# Altium PCB RobonAUT_PCB.PcbDoc (part 1 of 2)
Units mil, origin at the board's own origin, x right, y up, seen from the top; angles counter-clockwise.
Board outline 5019.69 x 5708.66 mil, 2 copper layers (Top Layer, Bottom Layer), stack 62.441 mil thick; 70 components, 117 nets, 446 pads, 237 vias.
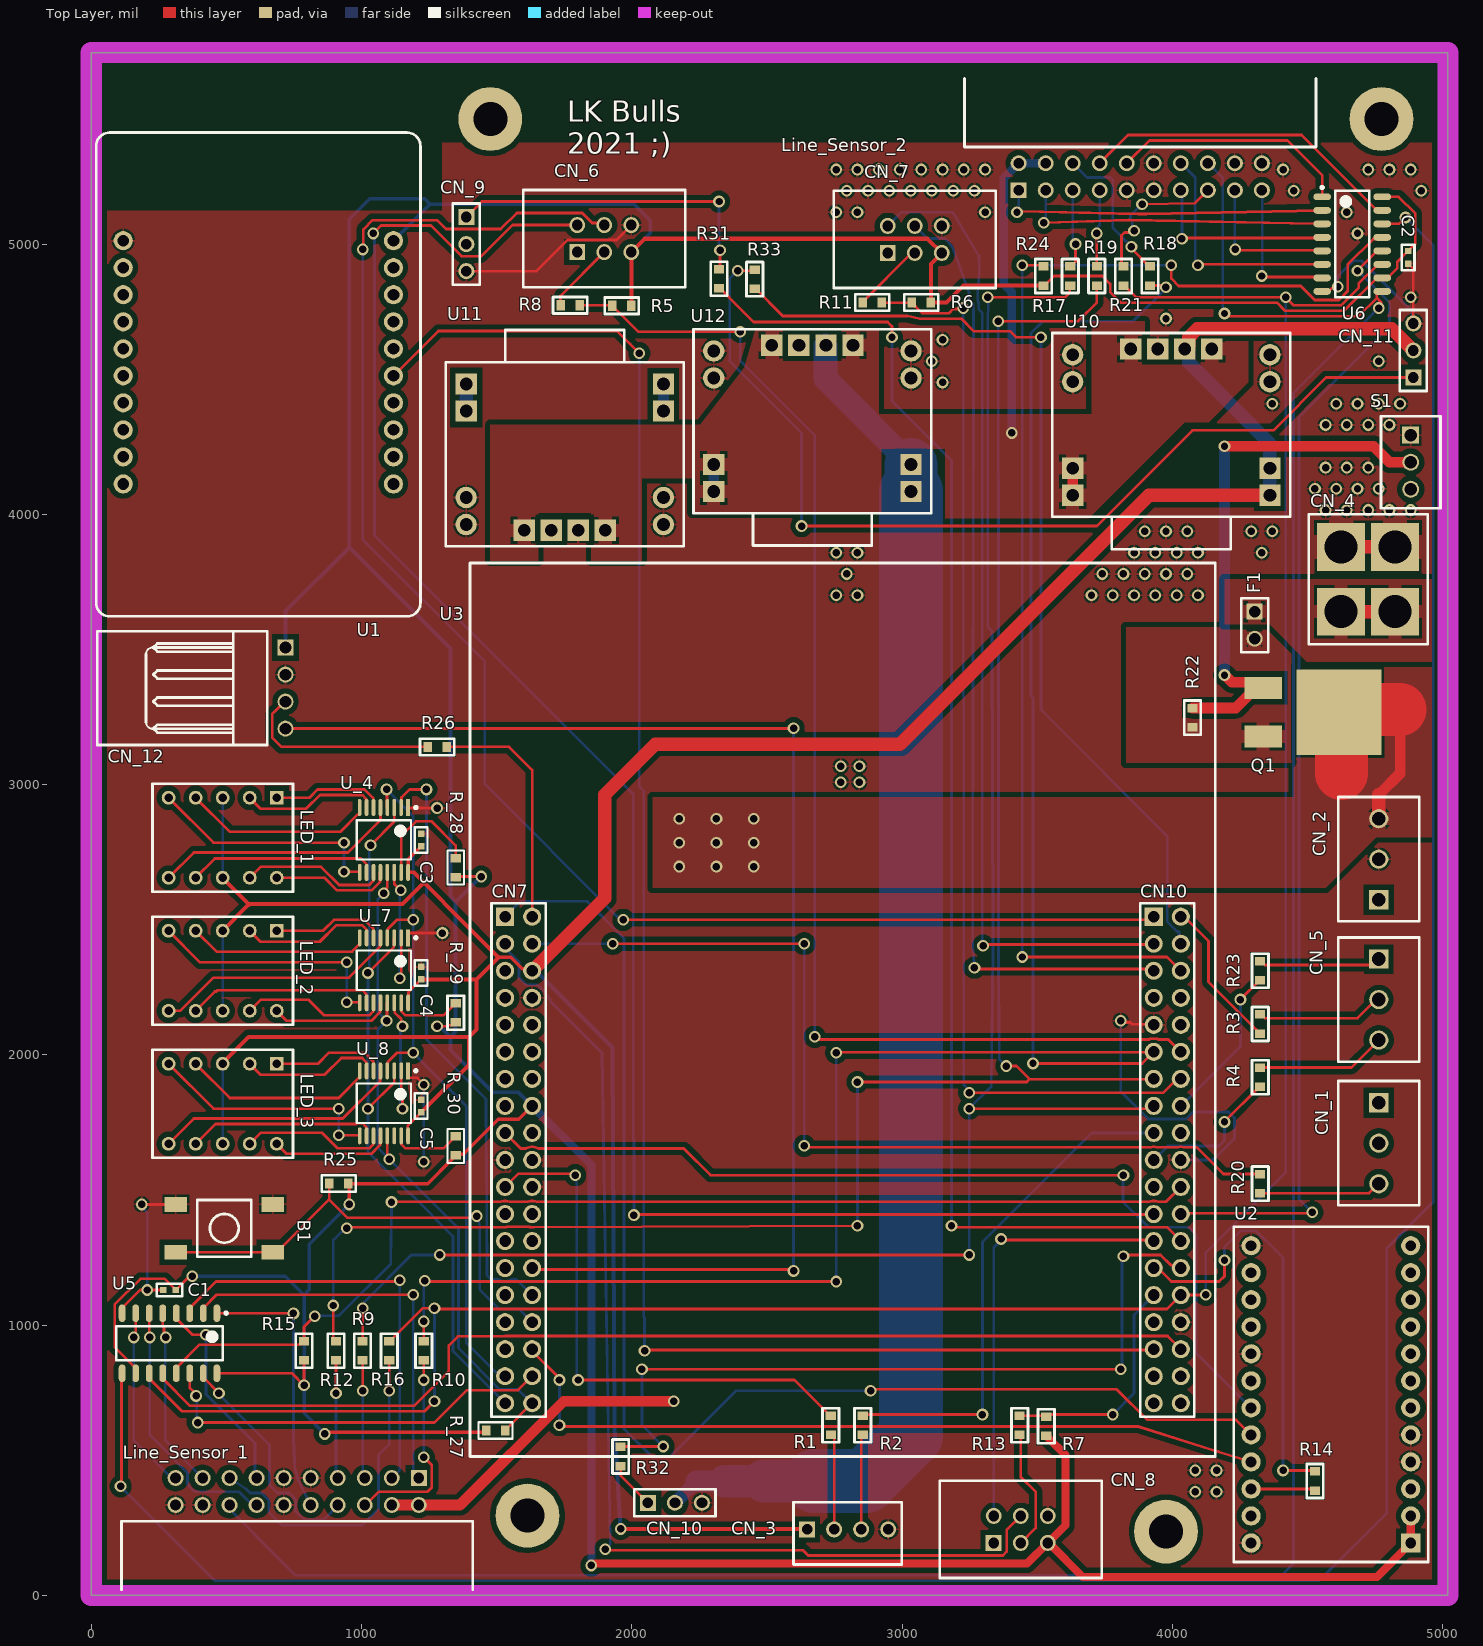
[diagram p0: Top Layer view]
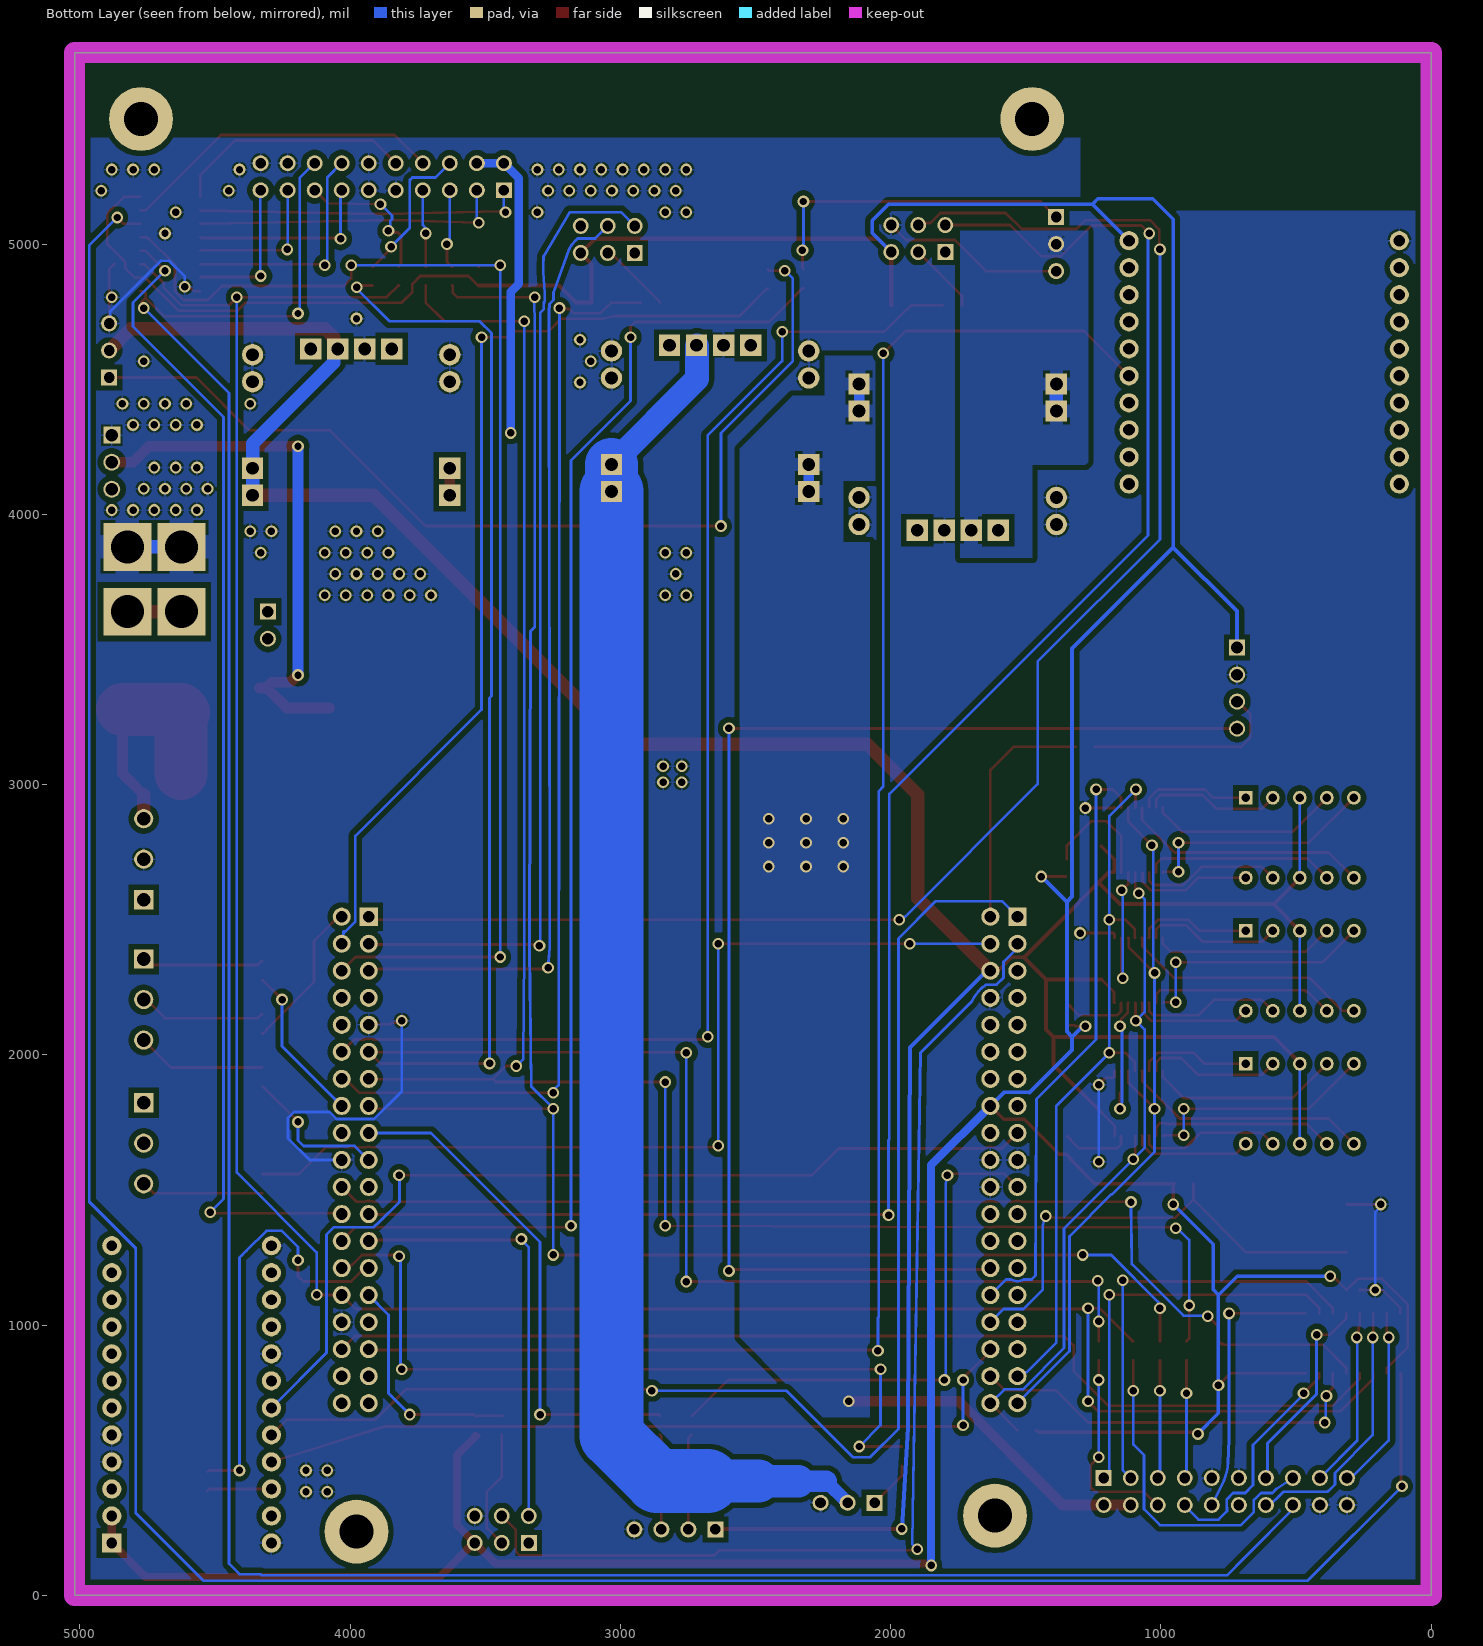
[diagram p1: Bottom Layer view, seen from below]
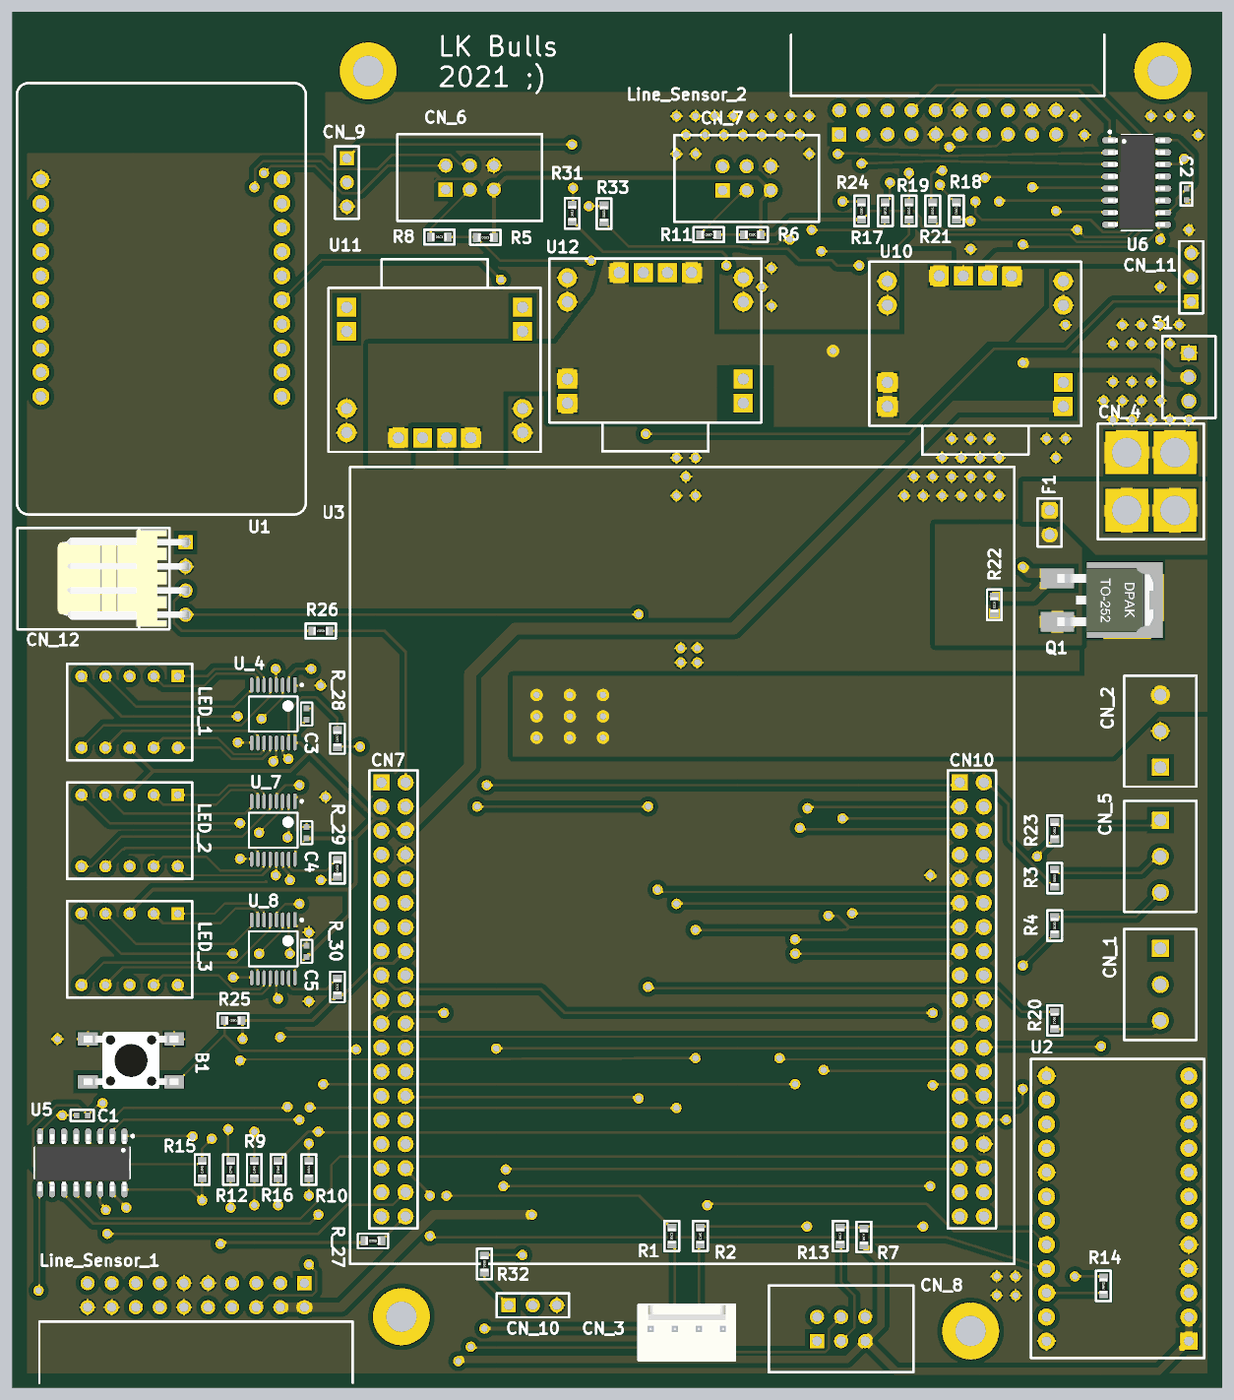
[diagram p3: 3D render of the assembled board from above, using the file's embedded part models]

## Layer stack, top to bottom
Top Solder: solder mask 0.4, Solder Resist, Dk 3.5
Top Layer: signal copper 0.7087
Dielectric1: core 61.0236, FR-4, Dk 4.8
Bottom Layer: signal copper 0.7087
Bottom Solder: solder mask 0.4, Solder Resist, Dk 3.5

## Board outline
0,0 5019.68,0 5019.68,5708.66 0,5708.66

## Design rules (kind name [scope] priority, off if disabled: settings)
BoardOutlineClearance [All] p1: gap=9.84 ignorepadtopadclearanceinfootprint=FALSE except(0: Arc-SplitContinuation Track-SplitContinuation SMDPad-SplitContinuation THPad-SplitContinuation Via-SplitContinuation Fill-SplitContinuation Poly-SplitContinuation Region-SplitContinuation Text-SplitContinuation)
Clearance Clearance-xPP-xTP-xTT [All] p1: gap=10 ignorepadtopadclearanceinfootprint=FALSE except(0: Arc-Hole Track-Hole SMDPad-Hole THPad-Hole Via-Hole Fill-Hole Poly-Hole Region-Hole Text-Hole; 20: Arc-Fill Arc-Poly Arc-Region Track-Fill Track-Poly Track-Region SMDPad-Fill SMDPad-Poly SMDPad-Region THPad-Fill THPad-Poly THPad-Region Via-Fill Via-Poly Via-Region Fill-Fill Fill-Poly Fill-Region Poly-Poly Poly-Region Region-Region)
ComponentClearance [All] p1: gap=9.84 collisioncheckmode=3 verticalgap=9.84 showdistances=FALSE
DiffPairsRouting [All] p1: maxlimit=9.84 minlimit=9.84 mostfreqgap=9.84 toplayer_minwidth=15 toplayer_maxwidth=15 toplayer_prefwidth=15 bottomlayer_minwidth=15 bottomlayer_maxwidth=15 bottomlayer_prefwidth=15 maxuncoupledlength=492.13
Height [All] p1: minheight=0 maxheight=984.25 prefheight=492.13
HoleSize HoleSize-PTH [All] p1: absolutevalues=TRUE maxlimit=236.22 minlimit=27.56 maxpercent=80.000 minpercent=20.000
HoleToHoleClearance [All] p1: gap=13.78 allowstackedmicrovias=TRUE
MinimumAnnularRing "Minimum IAR  >0.45mm" [((ObjectKind = 'Pad') OR (ObjectKind = 'Via')) And (Layer = 'MultiLayer') And (HoleDiameter > AsMM(0.45))] p1: minimumring=6.89 // minimum inner annular ring for pads > 0.45mm finished hole size
MinimumAnnularRing "Minimum IAR <=0.45mm" [((ObjectKind = 'Pad') OR (ObjectKind = 'Via')) And (Layer = 'MultiLayer') And (HoleDiameter <= AsMM(0.45))] p2: minimumring=6.89 // minimum inner annular ring for pads <= 0.45mm finished hole size
MinimumSolderMaskSliver [All] p1: minsoldermaskwidth=3.15
PlaneClearance PlaneClearance-IPI [All] p1: clearance=9.84
PlaneConnect [All] p1: planeconnectstyle=Relief reliefexpansion=6.89 reliefentries=4 reliefconductorwidth=7.87 reliefairgap=7.87
PolygonConnect PolygonConnect_4 [InNet('GND') vs HasFootprint('TáP AKKSIHOZ')] p1: connectstyle=Relief reliefconductorwidth=90 reliefentries=4 polygonreliefangle="90 Angle" airgapwidth=10
PolygonConnect PolygonConnect_3 [InNet('NetF1_2') vs InNet('NetF1_2')] p2: connectstyle=Relief reliefconductorwidth=50 reliefentries=4 polygonreliefangle="90 Angle" airgapwidth=10
PolygonConnect PolygonConnect_2 [InNet('11.1V') vs InNet('11.1V')] p3: connectstyle=Relief reliefconductorwidth=50 reliefentries=4 polygonreliefangle="90 Angle" airgapwidth=10
PolygonConnect PolygonConnect_1 [InNet('NetCN_4_1') vs InNet('NetCN_4_1')] p4: connectstyle=Relief reliefconductorwidth=50 reliefentries=4 polygonreliefangle="90 Angle" airgapwidth=10
PolygonConnect [InNet('6V_1') vs InNet('6V_1')] p5: connectstyle=Relief reliefconductorwidth=50 reliefentries=4 polygonreliefangle="90 Angle" airgapwidth=10
PolygonConnect PolygonConnect-xTW [All] p6: connectstyle=Relief reliefconductorwidth=7.87 reliefentries=4 polygonreliefangle="90 Angle" airgapwidth=7.87
RoutingCorners [All] p1: cornerstyle=45-Degree minsetback=98.43 maxsetback=98.43
RoutingVias "RoutingVias > 0.45mm" [(ObjectKind = 'Via') And (HoleDiameter > AsMM(0.45))] p1: holewidth=19.68 width=33.46 viastyle="Through Hole" minholewidth=19.68 minwidth=33.46 maxholewidth=35.43 maxwidth=49.21 // finishet hole size > 0.45mm
RoutingVias "RoutingVias <= 0.45mm" [(ObjectKind = 'Via') And (HoleDiameter <= AsMM(0.45))] p2: holewidth=11.81 width=25.59 viastyle="Through Hole" minholewidth=9.84 minwidth=23.62 maxholewidth=17.72 maxwidth=31.5 // finishet hole size <= 0.45mm
SilkToSilkClearance [All] p1: silktosilkclearance=7.87
SilkToSolderMaskClearance SilkscreenOverComponentPads [IsPad] p1: minsilkscreentomaskgap=6.69 clearancetoexposedcopper=TRUE
SolderMaskExpansion [All] p1: expansion=3.94 istentingtop=FALSE
UnRoutedNet [All] p1: checkbadconnections=TRUE
Width Width-xTW [All] p1: maxlimit=236.22 minlimit=10 preferedwidth=12 minimp=50.000000 maximp=50.000000 favimp=50.000000
18 further rules are at their usual default settings.

## Classes and differential pairs
component class vonalszenzorok: C1 C2 Line_Sensor_1 Line_Sensor_2 R9 R10 R12 R15 R16 R17 R18 R19 R21 R24 U5 U6
component class tap: CN_4 F1 Q1 R22 S1 U10 U11 U12
component class szervok: CN_9 CN_10 CN_11 R31 R32 R33
component class nucleo_es_egyszerubb_dolgok: B1 CN_1 CN_2 CN_3 CN_5 CN_6 CN_7 CN_8 CN_12 R1 R2 R3 R4 R5 R6 R7 R8 R11 R13 R14 R20 R23 R25 R26 U1 U2 U3
component class kijelzok: C3 C4 C5 LED_1 LED_2 LED_3 R_27 R_28 R_29 R_30 U_4 U_7 U_8

## Components (designator, comment, footprint, x,y, rotation, side; value= is the part's Value field where it differs from the comment)
B1 "Button" FP_BTN_SMD 492.13,1358.27 r90 top
C1 "100nF" FP_0402_CAP_050 289.42,1130.19 r0 top
C2 "100nF" FP_0402_CAP_050 4872.05,4950.79 r90 top
C3 "100nF" FP_0402_CAP_050 1220.47,2795.28 r270 top
C4 "100nF" FP_0402_CAP_050 1220.47,2303.15 r270 top
C5 "100nF" FP_0402_CAP_050 1220.47,1811.02 r270 top
CN_1 "DC_drive_CN4" DC_DRIVE_CN_STELVIO 4763.78,1673.23 r90 top
CN_2 "DC_drive_CN2" DC_DRIVE_CN_STELVIO 4763.78,2724.02 r270 top
CN_3 "Magnes" FP_CONN4_TAP_254MM 2648.48,244.36 r270 top
CN_4 "https://shop.modell.hu/kabel-amass-xt60-cap-apa-csatlakozoval-szerelve" "TáP AKKSIHOZ" 4724.41,3759.84 r0 top
CN_5 "DC_drive_CN5" DC_DRIVE_CN_STELVIO 4763.78,2204.72 r90 top
CN_6 "tavolsagszenzor board lábsor" "6P KONNEKTOR (TáVOLSáGSZENZOR)" 1898.03,5020.47 r0 top
CN_7 "tavolsagszenzor board lábsor" "6P KONNEKTOR (TáVOLSáGSZENZOR)" 3046.9,5017.19 r0 top
CN_8 "tavolsagszenzor board lábsor" "6P KONNEKTOR (TáVOLSáGSZENZOR)" 3439.03,244.36 r0 top
CN_9 "kormanyzo szervo" FP_CONN3_TUSKE_254MM 1387.8,5100 r180 top
CN_10 "kormanyzo szervo" FP_CONN3_TUSKE_254MM 2059.5,342.79 r270 top
CN_11 "szenzor szervo" FP_CONN3_TUSKE_254MM 4891.73,4506.3 r0 top
CN_12 "Bluetooth" FP_CONN4_TAP_254MM_90 718.5,3507.09 r180 top
F1 "Fuse" FP_CONN2_TUSKE_254MM 4304.37,3639.84 r180 top
LED_1 "8_Segment_display" "8 SEGMENT DISPLAY" 486.27,2803.42 r270 top
LED_2 "8_Segment_display" "8 SEGMENT DISPLAY" 486.27,2311.29 r270 top
LED_3 "8_Segment_display" "8 SEGMENT DISPLAY" 486.27,1819.16 r270 top
Line_Sensor_1 "Line_Sensor" CONNECTOR-20P 1211.81,434.65 r0 top
Line_Sensor_2 "Line_Sensor" CONNECTOR-20P 3431.22,5199.21 r180 top
Q1 "PMOS" FP_DPAK-TO252 4616.14,3267.72 r270 top
R1 "1K" FP_0603_RES 2736.22,629.92 r90 top
R2 "1K" FP_0603_RES 2854.33,629.92 r270 top
R3 "1K" FP_0603_RES 4324.85,2114.44 r90 top
R4 "1K" FP_0603_RES 4324.85,1917.59 r90 top
R5 "20K" FP_0603_RES 1962.65,4771.92 r0 top
R6 "20K" FP_0603_RES 3070.87,4783.46 r180 top
R7 "20K" FP_0603_RES 3533.46,625.98 r90 top
R8 "1K" FP_0603_RES 1771.65,4773.62 r0 top
R9 "1K" FP_0603_RES 1003.94,905.51 r270 top
R10 "1K" FP_0603_RES 1230.31,905.51 r90 top
R11 "1K" FP_0603_RES 2889.76,4783.46 r0 top
R12 "1K" FP_0603_RES 905.51,905.51 r270 top
R13 "1K" FP_0603_RES 3435.04,629.92 r90 top
R14 "1K" FP_0603_RES 4527.56,423.23 r90 top
R15 "20K" FP_0603_RES 787.4,905.51 r270 top
R16 "1K" FP_0603_RES 1102.36,905.52 r270 top
R17 "1K" FP_0603_RES 3622.04,4881.9 r90 top
R18 "1K" FP_0603_RES 3917.32,4881.9 r270 top
R19 "1K" FP_0603_RES 3720.47,4881.9 r90 top
R20 "1K" FP_0603_RES 4324.85,1523.89 r270 top
R21 "1K" FP_0603_RES 3818.89,4881.9 r90 top
R22 "20K" FP_0603_RES 4074.8,3248.03 r90 top
R23 "1K" FP_0603_RES 4324.85,2311.29 r90 top
R24 "20K" FP_0603_RES 3523.62,4881.9 r270 top
R25 "20K" FP_0603_RES 915.41,1523.89 r180 top
R26 "1K" FP_0603_RES 1279.53,3139.76 r180 top
R31 "1K" FP_0603_RES 2322.83,4872.05 r90 top
R32 "1K" FP_0603_RES 1958.66,514.24 r270 top
R33 "1K" FP_0603_RES 2454.78,4870.34 r90 top
R_27 "20K" FP_0603_RES 1496.06,610.24 r180 top
R_28 "3K9" FP_0603_RES 1348.43,2692.91 r270 top
R_29 "3K9" FP_0603_RES 1348.43,2155.51 r270 top
R_30 "3K9" FP_0603_RES 1348.43,1663.39 r270 top
S1 "TSSM-1022-A2" SAJATSWITCH 4881.89,4192.91 r180 top
U1 "SLTB004A-Thunderboard" SLTB004A 18.11,3622.6 r0 top
U2 "STEVAL-MKI196V1" "STEVAL IMU 20 TüSKE ANYA" 4586.61,744.09 r180 top
U3 "NUCLEO-F446RE" FP_NUCLEO-64 1531.15,2511.29 r0 top
U5 "74HC595D" "SO16 (PL.:SHIFT-REGISTERHEZ)" 289.42,933.34 r270 top
U6 "74HC595D" "SO16 (PL.:SHIFT-REGISTERHEZ)" 4665.35,5000 r0 top
U10 "hybrid DC/DC converter" "DC-DC KONVERTER KöZöS" 3996.06,4330.71 r0 top
U11 "hybrid DC/DC converter" "DC-DC KONVERTER KöZöS" 1751.97,4222.44 r180 top
U12 "hybrid DC/DC converter" "DC-DC KONVERTER KöZöS" 2668.09,4344.62 r0 top
U_4 "STP08CP05TTR" SOP127P600-sajat_0095-015 1082.68,2795.28 r270 top
U_7 "STP08CP05TTR" SOP127P600-sajat_0095-015 1082.68,2312.99 r270 top
U_8 "STP08CP05TTR" SOP127P600-sajat_0095-015 1082.68,1820.87 r270 top

## Footprints (in the part's own frame and the unit in brackets; to place one, negate y for a bottom-side part, rotate by r counter-clockwise, add the part's x,y. Pads: shape width x height; smd on the part's side, far side on the other; paste and mask are expansions set on the pad)
"6P KONNEKTOR (TáVOLSáGSZENZOR)" [mm]
  rect 1.5x1.5 hole 1.02: 1(-2.54,-1.27)
  round 1.5 hole 1.02: 2(-2.54,1.27) 3(0,-1.27) 4(0,1.27) 5(2.54,-1.27) 6(2.54,1.27)
  silkscreen extent -7.62,-4.57 7.62,4.57, body extent -7.87,-4.57 7.87,4.57, height 8.8
"8 SEGMENT DISPLAY" [mm]
  rect 1.3x1.3 hole 0.8: 1(-3.76,5.08)
  round 1.3 hole 0.8: 2(-3.76,2.54) 3(-3.76,0) 4(-3.76,-2.54) 5(-3.76,-5.08) 6(3.76,-5.08) 7(3.76,-2.54) 8(3.76,0) 9(3.76,2.54) 10(3.76,5.08)
  silkscreen extent -5.08,-6.6 5.08,6.6, body extent -5.08,-6.6 5.08,6.6, height 7
CONNECTOR-20P [mm] "Right angle ribbon cable connector"
  rect 1.5x1.5 hole 1: 1(0,0)
  round 1.5 hole 1: 2(0,-2.54) 3(-2.54,0) 4(-2.54,-2.54) 5(-5.08,0) 6(-5.08,-2.54) 7(-7.62,0) 8(-7.62,-2.54) 9(-10.16,0) 10(-10.16,-2.54) 11(-12.7,0) 12(-12.7,-2.54) 13(-15.24,0) 14(-15.24,-2.54) 15(-17.78,0) 16(-17.78,-2.54) 17(-20.32,0) 18(-20.32,-2.54) 19(-22.86,0) 20(-22.86,-2.54)
  silkscreen extent -27.94,-10.5 5.08,-4.06, body extent -28.04,-13.3 5.18,-3.96, height 8.95
"DC-DC KONVERTER KöZöS" [mm]
  round 2 hole 1.2: 1(-9.271,6.604) 2(-9.271,4.064) 5(9.271,6.604) 6(9.271,4.064)
  rect 2x2 hole 1.2: 3(-9.271,-4.064) 4(-9.271,-6.604) 7(9.271,-4.064) 8(9.271,-6.604) 9(-3.81,7.147) 10(-1.27,7.147) 11(1.27,7.147) 12(3.81,7.147)
  silkscreen extent -11.18,-11.68 11.18,8.64, body extent -11.18,-11.68 11.18,8.64, height 7.55
DC_DRIVE_CN_STELVIO [mm] "3-as konnektor DC_Drivehoz"
  rect 1.8x1.8 hole 1.3: 1(3.81,0)
  round 1.8 hole 1.3: 2(0,0) 3(-3.81,0)
  silkscreen extent -5.84,-3.81 5.84,3.81, body extent -5.84,-3.81 5.84,3.81, height 9.1
FP_0402_CAP_050 [mm] "0.5mm magas 0402 kapacitás"
  rect 0.6x0.6 smd: 1(-0.6,0) 2(0.6,0)
  silkscreen extent -1.2,-0.6 1.2,0.6, body extent -0.5,-0.25 0.5,0.25, height 0.5
FP_0603_RES [mm] "0603 ellenállás"
  rect 0.8x0.95 smd: 1(-0.9,0) 2(0.9,0)
  silkscreen extent -1.6,-0.77 1.6,0.77, body extent -0.8,-0.4 0.8,0.4, height 0.44
FP_BTN_SMD [mm] "SMD Push Button 6x6mm"
  rect 1.4x2.1 smd: 1(2.25,4.55) 2(2.25,-4.55) 3(-2.25,4.55) 4(-2.25,-4.55)
  silkscreen extent -2.67,-2.54 2.67,2.54, body extent -3,-5 3,5, height 5.1
FP_CONN2_TUSKE_254MM [mm] "2×1 tüskesor"
  rect 1.5x1.5 hole 1.1: 1(0,0)
  round 1.5 hole 1.1: 2(0,2.54)
  silkscreen extent -1.27,-1.27 1.27,3.81, body extent -1.27,-1.27 1.27,3.81, height 8.54
FP_CONN3_TUSKE_254MM [mm] "5×1 tüskesor"
  rect 1.5x1.5 hole 1: 1(0,0)
  round 1.5 hole 1: 2(0,2.54) 3(0,5.08)
  silkscreen extent -1.27,-1.27 1.27,6.35, body extent -1.27,-1.27 1.27,6.35, height 8.54
FP_CONN4_TAP_254MM [mm] "álló két pólusú tápcsatlakozó 2.54mm"
  rect 1.5x1.5 hole 1: 1(0,0)
  round 1.5 hole 1: 2(0,2.54) 3(0,5.08) 4(0,7.62)
  silkscreen extent -2.54,-1.27 3.3,8.89, body extent -2.52,-1.27 3.28,8.89, height 11.56
FP_CONN4_TAP_254MM_90 [mm] "fekvő két pólusú tápcsatlakozó 2.54mm"
  rect 1.5x1.5 hole 1.1: 1(0,0)
  round 1.5 hole 1.1: 2(0,2.54) 3(0,5.08) 4(0,7.62)
  silkscreen extent 1.7,-1.53 17.7,9.15, body extent -0.34,-1.3 13.48,8.86, height 5.8
FP_DPAK-TO252 [mm] "D-PAK Package"
  rect 2.08x3.5 smd: 1(-2.286,-7.112) 3(2.286,-7.112)
  rect 8x8 smd: 2(0,0)
  body extent -3.37,-7.11 3.37,2.99, height 2.37
FP_NUCLEO-64 [mm]
  rect 1.7x1.7 hole 1.1: 1(0,0) 39(60.96,0)
  round 1.7 hole 1.1: 2(2.54,0) 3(0,-2.54) 4(2.54,-2.54) 5(0,-5.08) 6(2.54,-5.08) 7(0,-7.62) 8(2.54,-7.62) 9(0,-10.16) 10(2.54,-10.16) 11(0,-12.7) 12(2.54,-12.7) 13(0,-15.24) 14(2.54,-15.24) 15(0,-17.78) 16(2.54,-17.78) 17(0,-20.32) 18(2.54,-20.32) 19(0,-22.86) 20(2.54,-22.86) 21(0,-25.4) 22(2.54,-25.4) 23(0,-27.94) 24(2.54,-27.94) 25(0,-30.48) 26(2.54,-30.48) 27(0,-33.02) 28(2.54,-33.02) 29(0,-35.56) 30(2.54,-35.56) 31(0,-38.1) 32(2.54,-38.1) 33(0,-40.64) 34(2.54,-40.64) 35(0,-43.18) 36(2.54,-43.18) 37(0,-45.72) 38(2.54,-45.72) 40(63.5,0) 41(60.96,-2.54) 42(63.5,-2.54) 43(60.96,-5.08) 44(63.5,-5.08) 45(60.96,-7.62) 46(63.5,-7.62) 47(60.96,-10.16) 48(63.5,-10.16) 49(60.96,-12.7) 50(63.5,-12.7) 51(60.96,-15.24) 52(63.5,-15.24) 53(60.96,-17.78) 54(63.5,-17.78) 55(60.96,-20.32) 56(63.5,-20.32) 57(60.96,-22.86) 58(63.5,-22.86) 59(60.96,-25.4) 60(63.5,-25.4) 61(60.96,-27.94) 62(63.5,-27.94) 63(60.96,-30.48) 64(63.5,-30.48) 65(60.96,-33.02) 66(63.5,-33.02) 67(60.96,-35.56) 68(63.5,-35.56) 69(60.96,-38.1) 70(63.5,-38.1) 71(60.96,-40.64) 72(63.5,-40.64) 73(60.96,-43.18) 74(63.5,-43.18) 75(60.96,-45.72) 76(63.5,-45.72)
  silkscreen extent -3.3,-50.72 66.72,33.25, body extent -3.3,-50.72 66.72,33.25, height 11
SAJATSWITCH [mm]
  rect 1.6x1.6 hole 1.2: 1(0,-2.54)
  round 1.6 hole 1.2: 2(0,0) 3(0,2.54)
  silkscreen extent -2.79,-4.32 2.79,4.32, body extent -2.79,-4.32 2.79,4.32, height 22.5
SLTB004A [mm] "Thunderboard Sense 2 module"
  round 1.8 hole 1.1: 1(2.54,35.306) 2(27.94,35.306) 3(2.54,32.766) 4(27.94,32.766) 5(2.54,30.226) 6(27.94,30.226) 7(2.54,27.686) 8(27.94,27.686) 9(2.54,25.146) 10(27.94,25.146) 11(2.54,22.606) 12(27.94,22.606) 13(2.54,20.066) 14(27.94,20.066) 15(2.54,17.526) 16(27.94,17.526) 17(2.54,14.986) 18(27.94,14.986) 19(2.54,12.446) 20(27.94,12.446)
  Top Layer pour cut-out: -2.032,38.1 -2.032,47.752 32.512,47.752 32.512,38.1
  Bottom Layer pour cut-out: -2.032,38.1 -2.032,47.752 32.512,47.752 32.512,38.1
  silkscreen extent 0,0 30.48,45.47
"SO16 (PL.:SHIFT-REGISTERHEZ)" [mm] "SOP, 16-Leads, Body 9,90x3,90mm, Pitch 1,27mm, IPC Low Density"
  oval 1.65x0.65 smd: 1(-2.825,4.445) 2(-2.825,3.175) 3(-2.825,1.905) 4(-2.825,0.635) 5(-2.825,-0.635) 6(-2.825,-1.905) 7(-2.825,-3.175) 8(-2.825,-4.445) 9(2.825,-4.445) 10(2.825,-3.175) 11(2.825,-1.905) 12(2.825,-0.635) 13(2.825,0.635) 14(2.825,1.905) 15(2.825,3.175) 16(2.825,4.445)
  silkscreen extent -2.95,-5 1.6,5.45, body extent -3,-5 3,5, height 1.75
SOP127P600-sajat_0095-015 [mm]
  rect 1.6x0.35 smd: 1(-3.05,2.275)
  oval 1.6x0.35 smd: 2(-3.05,1.625) 3(-3.05,0.975) 4(-3.05,0.325) 5(-3.05,-0.325) 6(-3.05,-0.975) 7(-3.05,-1.625) 8(-3.05,-2.275) 9(3.05,-2.275) 10(3.05,-1.625) 11(3.05,-0.975) 12(3.05,-0.325) 13(3.05,0.325) 14(3.05,0.975) 15(3.05,1.625) 16(3.05,2.275)
  silkscreen extent -3.17,-2.55 1.85,3.13, body extent -2.25,-2.55 2.25,2.55, height 1.2
"STEVAL IMU 20 TüSKE ANYA" [mm]
  rect 1.8x1.8 hole 1.02: 1(-7.5,13.97)
  round 1.8 hole 1.02: 2(-7.5,11.43) 3(-7.5,8.89) 4(-7.5,6.35) 5(-7.5,3.81) 6(-7.5,1.27) 7(-7.5,-1.27) 8(-7.5,-3.81) 9(-7.5,-6.35) 10(-7.5,-8.89) 11(-7.5,-11.43) 12(-7.5,-13.97) 13(7.5,-13.97) 14(7.5,-11.43) 15(7.5,-8.89) 16(7.5,-6.35) 17(7.5,-3.81) 18(7.5,-1.27) 19(7.5,1.27) 20(7.5,3.81) 21(7.5,6.35) 22(7.5,8.89) 23(7.5,11.43) 24(7.5,13.97)
  silkscreen extent -9.14,-15.75 9.14,15.75, body extent -9.14,-15.75 9.14,15.75, height 10.1
"TáP AKKSIHOZ" [mm]
  rect 4.5x4.5 hole 3.1: 1(-2.54,-3.048) 1(2.54,-3.048) 2(-2.54,3.048) 2(2.54,3.048)
  silkscreen extent -5.59,-6.1 5.59,6.1, body extent -5.59,-6.1 5.59,6.1, height 5

## Part data
B1: library part "Button 4P", "Push button"
C1 C2 C3 C4 C5: library part CAP, "Capacitor"
CN_1: "CN4 a motvez kártyán a neve"
CN_2: "CN2 a motvez kártyán a neve", Supplier=AUT
CN_3: library part Encoder, "A1333", Supplier=AUT
CN_4: library part "akksi 11.1V", "akksi 11.1V, csatlakozó: XT60", Reference=https://shop.modell.hu/kabel-amass-xt60-cap-apa-csatlakozoval-szerelve, Supplier=shop.model.hu
CN_5: "CN5 a motvez kártyán a neve", Supplier=AUT
CN_6 CN_7 CN_8: library part VL53L1X-satel, megvan=igen, Supplier=ST
CN_9 CN_10: library part "MG-995 servo", Reference=100.358.11, Supplier=hestore
CN_11: library part "HPI MS-22 servo", "szenzor szervo (gyari)"
CN_12: library part HC-05, "HC-05 tokozva, kérdés, hogy melyik lábon vannak valójában a dolgok", reference1="100.416.39 (gombbal)", reference2="100.355.62 (gomb nélkül)", reference3="100.355.65 (master-slave)", Supplier=hestore
Line_Sensor_1 Line_Sensor_2: "AUT"
Q1: "MOSFET, P CH"
R1 R2 R3 R4 R5 R6 R7 R8 R9 R10 R11 R12 R13 R14 R15 R16 R17 R18 R19 R20 R21 R22 R23 R24 R25 R26 R31 R32 R33 R_27 R_28 R_29 R_30: library part RES, "Resistor"
S1: library part SajatSwitch, Reference=100.264.66, Supplier=Hestore
U1: library part SLTB004A, "SiLabs Thunderboard Sense 2 module"
U2: library part STEVAL-MKI176V1, "LSM6DS3H, SPI"
U5 U6: "Vonalszenzorhoz", Reference=87-01-20, Supplier=Lomex
U10: library part "DSN-1504-3A_5 / STDN-3A24-ADJ_5", "hybrid dc/dc: DSN-1504-3A / STDN-3A24-ADJ; 5V"
U11 U12: library part "DSN-1504-3A_6 / STDN-3A24-ADJ_6", "hybrid dc/dc: DSN-1504-3A / STDN-3A24-ADJ; 6V"
U_4 U_7 U_8: "Low voltage, low current power 8-bit shift register"
LED_1 LED_2 LED_3: Reference=35-03-94, Supplier=lomex
U3: Name="Nucleo F446RE", Reference=NUCLEO, Supplier=Tanszék

## Free pads (board coordinates)
  round 236.22 hole 125.98: 1(1476.38,5462.6) 2(4773.62,5462.6) 3(1614.17,295.28) 4(3976.38,236.22)

## Via types
v1: diameter 43.31, hole 27.56, Top Layer to Bottom Layer, 234 vias
v2: diameter 43.31, hole 28, Top Layer to Bottom Layer, 3 vias

## Nets (pads, with @x,y where several pads share a name; then routed paths per layer and width w, separated by ;. In a path a pad name is that pad's centre, name@x,y a point inside that pad or via, vN(x,y) a via of type N, cw(c..) or ccw(c..) an arc to the next point about the centre after c; other vN are vias at no path point)
1Q0: Line_Sensor_1.8 U5.15 | length 860
  Top Layer w10: U5.15@414.42,822.12 414.42,806.05 v1(472.44,748.03)
  Bottom Layer w10: v1(472.44,748.03) 472.44,744.06 659.45,557.06 659.45,407.96 688.24,379.17 733.03,379.17 756.34,355.87 756.34,326.06 755.51,325.23 755.51,311.83 787.07,280.28 860.98,280.28 Line_Sensor_1.8@905.51,324.8
1Q1: Line_Sensor_1.10 U5.1 | length 1017
  Top Layer w10: U5.1@464.42,1044.56 746.78,1044.56 v1(748.03,1043.31)
  Bottom Layer w10: v1(748.03,1043.31) 748.03,578.09 752.22,490.57 ccw(c942.6,499.69) 771.94,414.82 Line_Sensor_1.10@811.81,334.65 Line_Sensor_1.10@805.51,324.8
1Q2: Line_Sensor_1.1 U5.2 | length 1509.5
  Top Layer w10: U5.2@414.42,1044.56 414.42,1064.24 462.38,1112.2 v1(1190.94,1112.2)
  Bottom Layer w10: v1(1190.94,1112.2) 1190.94,439.37 Line_Sensor_1.1@1205.51,424.8
1Q3: Line_Sensor_1.3 U5.3 | length 1595.1
  Top Layer w10: U5.3@364.42,1044.56 364.42,1064.24 461.6,1161.42 1137.32,1161.42 v1(1141.73,1165.83)
  Bottom Layer w10: Line_Sensor_1.3@1105.51,424.8 1105.51,428.08 1141.73,464.3 v1(1141.73,1165.83)
1Q4: Line_Sensor_1.13 U5.4 | length 768.7
  Top Layer w10: U5.4@314.42,1044.56 314.42,1024.87 374.73,964.57 v1(423.23,964.57)
  Bottom Layer w10: v1(423.23,964.57) 424.28,963.52 424.28,744.36 605.51,563.12 Line_Sensor_1.13@605.51,424.8
1Q5: Line_Sensor_1.17 U5.5 | length 672.5
  Top Layer w10: U5.5@264.42,1044.56 264.42,996.38 269.42,991.38 269.42,960.89 v1(275.59,954.72)
  Bottom Layer w10: v1(275.59,954.72) 273.68,952.81 273.68,911.19 273.68,572.78 Line_Sensor_1.17@411.81,434.65
1Q6: Line_Sensor_1.14 U5.6 | length 977.2
  Top Layer w10: U5.6@214.42,1044.56 214.42,956.84 v1(216.54,954.72)
  Bottom Layer w10: v1(216.54,954.72) 216.54,592.89 356.34,453.09 356.34,411 380.56,386.79 383.49,383.86 546.46,383.86 549.39,380.93 603.74,326.57 Line_Sensor_1.14@605.51,324.8
1Q7: Line_Sensor_1.19 U5.7 | length 683.9
  Top Layer w10: v1(157.48,954.72) 164.42,961.67 U5.7@164.42,1044.56
  Bottom Layer w10: v1(157.48,954.72) 157.48,572.83 Line_Sensor_1.19@305.51,424.8
2Q0: Line_Sensor_2.8 U6.15 | length 1204
  Top Layer w10: Line_Sensor_2.8@3731.22,5299.21 3835.55,5403.54 4478.35,5403.54 4756.89,5125 U6.15@4776.57,5125
2Q1: Line_Sensor_2.10 U6.1 | length 891
  Top Layer w10: Line_Sensor_2.10@3831.22,5299.21 3915.55,5383.54 4425.51,5383.54 4554.13,5254.92 U6.1@4554.13,5175
2Q2: Line_Sensor_2.1 U6.2 | length 1214.7
  Top Layer w10: v1(3425.2,5118.11) 3426.39,5119.3 3428.7,5121.61 3435.12,5121.61 3872.61,5110.98 3902.98,5110.98 4553.05,5123.92 4553.61,5124.48 U6.2@4554.13,5125
  Bottom Layer w10: v1(3425.2,5118.11) 3431.22,5124.13 Line_Sensor_2.1@3431.22,5199.21
2Q3: Line_Sensor_2.3 U6.3 | length 1152.6
  Top Layer w10: v1(3523.62,5078.74) 3837.43,5088.88 ; 3839.29,5088.89 4534.45,5075 U6.3@4554.13,5075
  Bottom Layer w10: v1(3523.62,5078.74) 3531.22,5086.33 Line_Sensor_2.3@3531.22,5199.21
2Q4: Line_Sensor_2.13 U6.4 | length 702.2
  Top Layer w10: v1(4035.43,5019.68) 4038.09,5022.34 4551.48,5022.34 U6.4@4554.13,5025
  Bottom Layer w10: Line_Sensor_2.13@4031.22,5199.21 4035.43,5194.99 v1(4035.43,5019.68)
2Q5: Line_Sensor_2.17 U6.5 | length 543.4
  Top Layer w10: v1(4232.28,4980.31) 4234.94,4977.66 4551.48,4977.66 U6.5@4554.13,4975
  Bottom Layer w10: Line_Sensor_2.17@4231.22,5199.21 4231.22,4981.38 v1(4232.28,4980.31)
2Q6: Line_Sensor_2.14 U6.6 | length 865.4
  Top Layer w10: v1(4094.49,4921.26) 4098.23,4925 U6.6@4554.13,4925
  Bottom Layer w10: Line_Sensor_2.14@4031.22,5299.21 4084.65,5245.78 4084.65,4940.12 4094.49,4930.27 v1(4094.49,4921.26)
2Q7: Line_Sensor_2.19 U6.7 | length 545
  Top Layer w10: v1(4330.71,4881.89) 4334.62,4877.98 4551.15,4877.98 U6.7@4554.13,4875
  Bottom Layer w10: v1(4330.71,4881.89) 4332.68,4883.87 4332.68,5197.74 Line_Sensor_2.19@4331.22,5199.21
5V: C3.2 C4.2 C5.2 CN_3.1 CN_11.2 LED_1.3 LED_1.8 LED_2.3 LED_2.8 LED_3.3 LED_3.8 U3.6 U10.7 U10.8 U10.11 U_4.16 U_7.16 U_8.16 | length 12834.8
  Top Layer w10: U_8.16@1172.24,1700.79 1171.24,1701.79 1171.24,1738.17 C5.2@1220.47,1787.4 ; U_7.16@1172.24,2192.91 1173.72,2194.39 1173.72,2232.78 C4.2@1220.47,2279.53 ; CN_3.1@2646.77,246.06 CN_3.1@2648.48,244.36
  Top Layer w13: 1194.93,2675.2 U_4.16@1172.24,2675.2 1172.24,2723.43 C3.2@1220.47,2771.65 ; 1506.67,2361.25 1551.85,2361.25 1594.49,2318.61 1623.83,2318.61 U3.6@1631.15,2311.29
  Top Layer w15: LED_3.3@486.27,1967.19 486.27,1970.6 582.6,2066.93 1397.64,2066.93 ; LED_2.3@486.27,2459.32 582.6,2555.65 582.6,2559.06 ; LED_1.8@486.27,2655.38 582.6,2559.06 ; 1193.92,2674.19 1230.31,2637.8 ; C5.2@1220.47,1787.4 1238.05,1804.98 1239.18,1804.98 1397.64,1963.44 1397.64,2066.93 ; C4.2@1220.47,2279.53 1424.94,2279.53 ; v1(1958.66,246.06) CN_3.1@2646.77,246.06 ; 582.6,2559.06 1151.57,2559.06 1230.31,2637.8 ; 1230.31,2637.8 1377.95,2490.16 1377.95,2489.97 1506.67,2361.25 1424.94,2279.53 ; 1397.64,2066.93 1424.94,2094.23 1424.94,2279.53
  Top Layer w50: U3.6@1631.15,2311.29 1899.61,2579.74 1899.61,2962.6 2086.61,3149.61 2992.13,3149.61 3913.23,4070.71 U10.8@4361.06,4070.71 ; U10.11@4046.08,4612.07 4060.45,4626.44 4060.45,4654.68 4092.21,4686.44 4811.59,4686.44 CN_11.2@4891.73,4606.3
  Bottom Layer w10: LED_3.8@486.27,1671.13 LED_3.3@486.27,1967.19 ; LED_2.8@486.27,2163.26 LED_2.3@486.27,2459.32 ; LED_1.8@486.27,2655.38 LED_1.3@486.27,2951.45 ; U10.11@4046.08,4612.07 4060.45,4597.7 4079.45,4578.7 U10.11@4079.45,4577.33
  Bottom Layer w15: U3.6@1631.15,2311.29 1645.21,2311.29 1662.65,2293.84 1662.85,2293.84 1929.13,2027.56 1936.16,619.36 v1(1958.66,246.06)
  Bottom Layer w50: U10.11@4060.45,4597.7 4060.45,4561.59 4361.06,4260.98 U10.7@4361.06,4170.71 U10.8@4361.06,4070.71
6V_1: CN_9.2 U11.7 U11.8 U11.11 | length 100
  Bottom Layer w50: U11.7@1386.97,4382.44 U11.8@1386.97,4482.44
6V_2: CN_10.2 U12.7 U12.8 U12.11 | length 5139.7
  Bottom Layer w10: U12.11@2716.54,4624.41 U12.11@2718.11,4625.98
  Bottom Layer w50: CN_10.2@2161.23,344.52 2239.03,422.31
  Bottom Layer w80: 2239.03,422.31 2342.52,422.31
  Bottom Layer w90: U12.11@2716.54,4624.41 2716.54,4501.18 U12.7@3033.09,4184.62
  Bottom Layer w120: 2342.52,423.23 2490.16,423.23
  Bottom Layer w160: 2490.16,423.23 2677.17,423.23
  Bottom Layer w196.85: U12.8@3033.09,4084.62 U12.7@3033.09,4184.62
  Bottom Layer w236.22: 2677.17,423.23 2864.17,423.23 3033.09,592.15 U12.8@3033.09,4084.62
11.1V: CN_2.3 Line_Sensor_1.2 Line_Sensor_1.4 Line_Sensor_2.2 Line_Sensor_2.4 Q1.2 U10.3 U10.4 U10.9 U10.12 U11.3 U11.4 U11.9 U11.12 U12.3 U12.4 U12.9 U12.12 | length 3532.9
  Top Layer w39.37: Line_Sensor_1.4@1111.81,334.65 Line_Sensor_1.2@1211.81,334.65 1364.4,334.65 1748.26,718.5 v1(2155.51,718.5) ; U10.4@3631.06,4070.71 U10.3@3631.06,4170.71 ; 4763.78,2962.6 4842.52,3041.34 4842.52,3277.56
  Top Layer w50: CN_2.3@4763.78,2874.02 4763.78,2962.6
  Top Layer w196.85: 4625.98,3041.34 4625.98,3257.87 Q1.2@4616.14,3267.72 4625.98,3277.56 4842.52,3277.56
  Bottom Layer w31.5: v1(3405.51,4301.18) 3405.51,4822.83 3375.98,4852.36 3375.98,5158.97 3375.94,5159.02 3375.94,5239.4 3375.98,5239.45 3375.98,5243.98 Line_Sensor_2.2@3431.22,5299.21 Line_Sensor_2.4@3531.22,5299.21
  Bottom Layer w39.37: U11.3@2116.97,4382.44 U11.4@2116.97,4482.44 ; U12.4@2303.09,4084.62 U12.3@2303.09,4184.62
  other v1: 2175.2,2696.85 2312.99,2696.85 2450.79,2696.85 2175.2,2785.43 2312.99,2785.43 2450.79,2785.43 2175.2,2874.02 2312.99,2874.02 2450.79,2874.02
enfb: R20.1 U3.4 | length 3485.3
  Top Layer w10: v1(1929.13,2411.42) 1929.26,2411.29 2595.25,2411.29 2595.38,2411.42 v1(2637.8,2411.42) ; v1(2637.8,1663.39) 2642.49,1658.69 3920.1,1658.69 ccw(c3920.05,1668.69) 3921.91,1658.87 cw(c3931.15,1611.29) 3940.46,1658.85 ccw(c3942.25,1668.69) 3942.17,1658.69 4020.1,1658.69 ccw(c4020.05,1668.69) 4021.91,1658.87 cw(c4031.15,1611.29) 4040.46,1658.85 ccw(c4042.25,1668.69) 4042.17,1658.69 4089.34,1658.69 4188.71,1559.32 R20.1@4324.85,1559.32
  Bottom Layer w10: U3.4@1631.15,2411.29 1631.22,2411.35 1929.07,2411.35 v1(1929.13,2411.42) ; v1(2637.8,1663.39) v1(2637.8,2411.42)
GND: B1.1 B1.2 C1.1 C2.1 C3.1 C4.1 C5.1 CN_2.2 CN_3.4 CN_4.2 CN_6.6 CN_7.6 CN_8.6 CN_9.3 CN_10.3 CN_11.3 CN_12.2 Line_Sensor_1.9 Line_Sensor_1.11 Line_Sensor_1.12 Line_Sensor_1.18 Line_Sensor_1.20 Line_Sensor_2.9 Line_Sensor_2.11 Line_Sensor_2.12 Line_Sensor_2.18 Line_Sensor_2.20 S1.1 U1.1 U2.4 U2.5 U2.13 U2.17 U2.24 U3.8 U3.19 U3.20 U3.22 U3.47 U3.58 U3.70 U5.8 U6.8 U10.1 U10.2 U10.5 U10.6 U10.10 U11.1 U11.2 U11.5 U11.6 U11.10 U12.1 U12.2 U12.5 U12.6 U12.10 U_4.1 U_7.1 U_8.1 | length 4294.3
  Top Layer w10: U5.8@114.42,1044.56 114.42,1064.24 180.37,1130.19 v1(206.69,1130.19) C1.1@265.8,1130.19 ; v1(187.01,1446.85) B1.1@312.99,1446.85 ; U_8.1@1172.24,1940.94 1172.24,1919.54 1176.1,1915.68 1204.4,1915.68 v2(1230.31,1889.76) ; U_7.1@1172.24,2433.07 1172.24,2446.93 1176.1,2450.79 v2(1299.21,2450.79) ; U_4.1@1172.24,2915.35 1174.21,2913.39 v2(1279.53,2913.39) ; CN_9.3@1387.8,4900 1647.29,4900 1762.29,5015 1942.56,5015 CN_6.6@1998.03,5070.47 ; v1(3809.06,2125.98) 3815.43,2119.61 3844.81,2119.61 3850.71,2113.72 3928.73,2113.72 U3.47@3931.15,2111.29 ; U6.8@4554.13,4825 4578.04,4825 4589.18,4836.15 4605.36,4836.15 v1(4611.73,4842.52) ; C2.1@4872.05,4927.17 4891.73,4907.48 CN_11.3@4891.73,4706.3
  Top Layer w50: CN_4.2@4624.41,3879.84 CN_4.2@4824.41,3879.84
  Top Layer w90: CN_4.2@4822.83,3881.42 CN_4.2@4824.41,3879.84
  Bottom Layer w10: v1(187.01,1446.85) 187.01,1437.84 206.69,1418.15 v1(206.69,1130.19) ; v1(1230.31,1604.33) v2(1230.31,1889.76) ; v1(3809.06,2125.98) 3809.06,1864.85 3911.08,1762.82 4051.23,1762.82 4077.03,1788.62 4208.1,1788.62 4229.57,1767.15 4229.57,1691.44 4149.42,1611.29 U3.58@4031.15,1611.29 ; v1(4611.73,4842.52) 4611.73,4880.1 4669.86,4938.23 4700.22,4938.23 4887.62,4750.83 4887.62,4710.41 CN_11.3@4891.73,4706.3
  Bottom Layer w50: CN_4.2@4624.41,3879.84 CN_4.2@4824.41,3879.84
  other v1: 4084.65,383.86 4163.39,383.86 4084.65,462.6 4163.39,462.6 2773.22,3009.28 2842.12,3009.28 2773.22,3068.34 2842.12,3068.34 2755.91,3700.79 2834.65,3700.79 3700.79,3700.79 3779.53,3700.79 3858.28,3700.79 3937.02,3700.79 4015.76,3700.79 4094.5,3700.79 2795.28,3779.53 3740.16,3779.53 3818.9,3779.53 3897.65,3779.53 3976.39,3779.53 4055.13,3779.53 2755.91,3858.28 2834.65,3858.28 3858.28,3858.28 3937.02,3858.28 4015.76,3858.28 4094.5,3858.28 4330.72,3858.28 3897.65,3937.02 3976.39,3937.02 4055.13,3937.02 4291.35,3937.02 4370.09,3937.02 4566.94,4015.76 4645.68,4015.76 4724.42,4015.76 4803.16,4015.76 4881.9,4015.76 4527.57,4094.5 4606.31,4094.5 4685.05,4094.5 4763.79,4094.5 4566.94,4173.24 4645.68,4173.24 4724.42,4173.24 4566.94,4330.72 4645.68,4330.72 4724.42,4330.72 4803.16,4330.72 4370.09,4409.46 4606.31,4409.46 4685.05,4409.46 4763.79,4409.46 4842.53,4409.46 3149.61,4488.2 3110.24,4566.94 4763.79,4566.94 3149.61,4645.68 3976.39,4724.42 4881.9,4803.16 4685.05,5039.38 2755.91,5118.12 2834.65,5118.12 3307.09,5118.12 4645.68,5118.12 2795.28,5196.86 2874.02,5196.86 2952.76,5196.86 3031.5,5196.86 3110.24,5196.86 3188.98,5196.86 3267.72,5196.86 4448.83,5196.86 4921.27,5196.86 2755.91,5275.6 2834.65,5275.6 2913.39,5275.6 2992.13,5275.6 3070.87,5275.6 3149.61,5275.6 3228.35,5275.6 3307.09,5275.6 4409.46,5275.6 4724.42,5275.6 4803.16,5275.6 4881.9,5275.6
NetB1_3: B1.3 B1.4 R25.2 U3.32 | length 1799.6
  Top Layer w10: B1.3@312.99,1269.68 B1.4@671.26,1269.68 685.04,1269.68 879.97,1464.62 ; R25.2@879.97,1523.89 879.97,1464.62 ; v1(1426.62,1403.72) 1393.25,1397.64 1384.96,1397.64 946.95,1397.64 879.97,1464.62
  Bottom Layer w10: v1(1426.62,1403.72) 1431.68,1393.9 1437.01,1366.76 1437.01,1131.89 1509.14,1059.75 1582.69,1059.75 U3.32@1631.15,1011.29
NetCN_1_3: CN_1.3 R20.2 | length 453.3
  Top Layer w10: R20.2@4324.86,1488.45 4727.23,1488.45 4762,1523.23 CN_1.3@4763.78,1523.23
NetCN_3_2: CN_3.2 R1.1 | length 355.5
  Top Layer w10: R1.1@2736.22,594.49 2736.67,594.49 2748.48,582.68 CN_3.2@2748.48,244.36
NetCN_3_3: CN_3.3 R2.2 | length 352.6
  Top Layer w10: CN_3.3@2848.48,244.36 2848.48,588.63 R2.2@2854.34,594.49
NetCN_4_1: CN_4.1 F1.1 | length 200
  Top Layer w50: CN_4.1@4624.41,3639.84 CN_4.1@4824.41,3639.84
NetCN_5_1: CN_5.1 R23.2 | length 453.9
  Top Layer w10: R23.2@4324.85,2346.72 4327.8,2346.72 4341.85,2332.68 4741.73,2332.68 CN_5.1@4763.78,2354.72
NetCN_5_2: CN_5.2 R3.2 | length 473.3
  Top Layer w10: R3.2@4324.85,2149.87 4327.8,2149.87 4341.85,2135.83 4685.04,2135.83 4753.94,2204.72 CN_5.2@4763.78,2204.72
NetCN_5_3: CN_5.3 R4.2 | length 481.1
  Top Layer w10: R4.2@4324.85,1953.02 4662.08,1953.02 CN_5.3@4763.78,2054.72
NetCN_6_2: CN_6.2 U3.61 | length 6817.6
  Top Layer w10: v1(1043.31,5039.37) 1072.52,5068.58 1256.24,5068.58 1369.35,4955.47 1443.2,4955.47 1558.2,5070.47 CN_6.2@1798.03,5070.47 ; v1(2007.87,1407.48) 2009.78,1409.38 3929.25,1409.38 U3.61@3931.15,1411.29
  Bottom Layer w10: v1(1043.31,5039.37) 1048.15,5034.53 1048.15,3922.32 2005.16,2965.31 2005.16,1686.85 2007.87,1684.13 v1(2007.87,1407.48)
NetCN_6_3: CN_6.3 R8.1 | length 263.9
  Top Layer w10: R8.1@1736.22,4773.62 1736.22,4808.66 CN_6.3@1898.03,4970.47
NetCN_6_4: CN_6.4 U3.39 | length 5890.6
  Top Layer w10: v1(1003.94,4980.31) 1006.65,4983.03 1006.65,5054.55 1040.68,5088.58 1279.84,5088.58 1312.95,5055.47 1514.91,5055.47 1574.44,5115 1816.48,5115 1853.5,5077.97 1890.53,5077.97 CN_6.4@1898.03,5070.47 ; v1(1968.5,2500) 3919.86,2500 U3.39@3931.15,2511.29
  Bottom Layer w10: v1(1003.94,4980.31) 1003.94,3907.48 1456.38,3455.04 1456.38,3002.28 1947.66,2511 1948.49,2511 1959.49,2500 v1(1968.5,2500)
NetCN_7_2: CN_7.2 U3.41 | length 3644.3
  Top Layer w10: v1(3299.67,2404) 3304.37,2408.7 3928.57,2408.7 U3.41@3931.15,2411.29
  Bottom Layer w10: CN_7.2@2946.9,5067.19 2997.82,5118.11 3187.12,5118.11 3284.37,4954.44 3285.34,4919.07 3285.34,4897.98 3280.28,4818.33 3280.28,4787.97 3282.41,4785.83 3283.94,4772.03 3283.94,4758.53 3296.93,4745.53 3296.93,2406.75 v1(3299.67,2404)
NetCN_7_3: CN_7.3 R11.1 | length 270.4
  Top Layer w10: R11.1@2854.33,4783.46 2854.33,4786.42 3035.11,4967.19 CN_7.3@3046.9,4967.19
NetCN_7_4: CN_7.4 U3.43 | length 3522.5
  Top Layer w10: v1(3267.72,2322.83) 3272.61,2317.94 3924.5,2317.94 U3.43@3931.15,2311.29
  Bottom Layer w10: CN_7.4@3046.9,5067.19 3093.64,5020.45 3158.68,5020.45 3164.54,5014.59 3180.36,4996.57 cw(c3146.9,4967.19) 3188.75,4982.41 3247.23,4822.54 3247.23,4793.67 3262.41,4778.49 3262.41,4765.27 3263.94,4763.74 3261.65,2401.61 ; 3261.76,2398.85 v1(3267.72,2322.83)